# EAGLE board top_pcb (EAGLE 8.4.1)
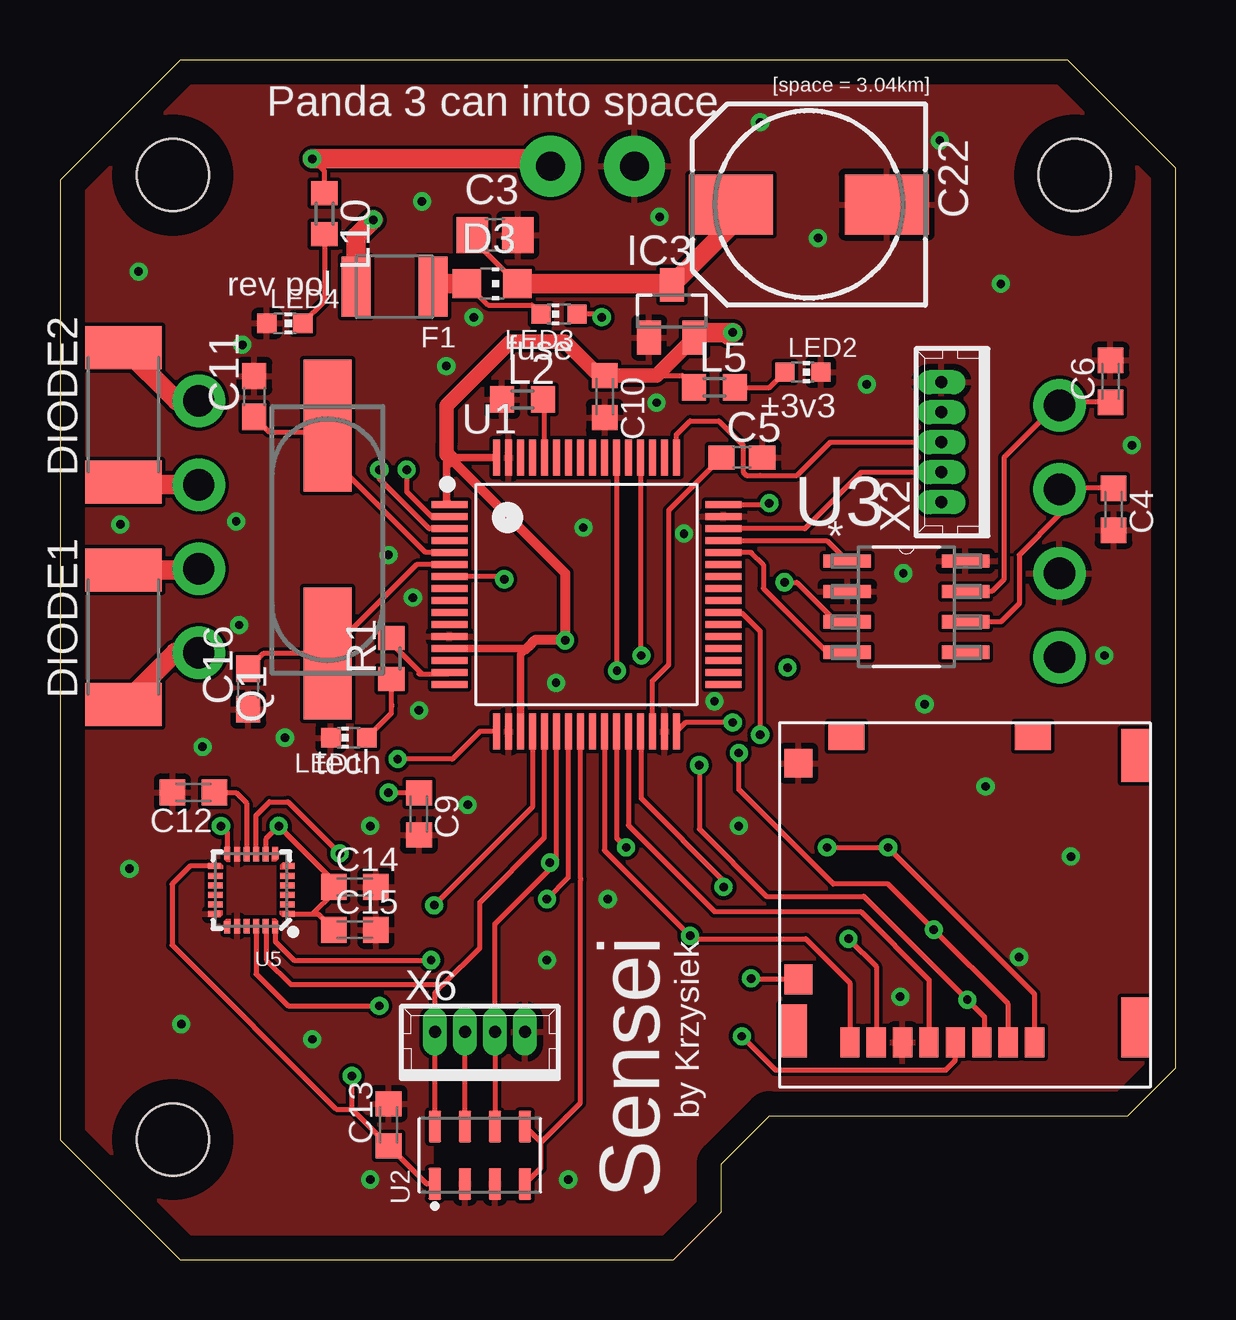
[diagram p0: board, top side]
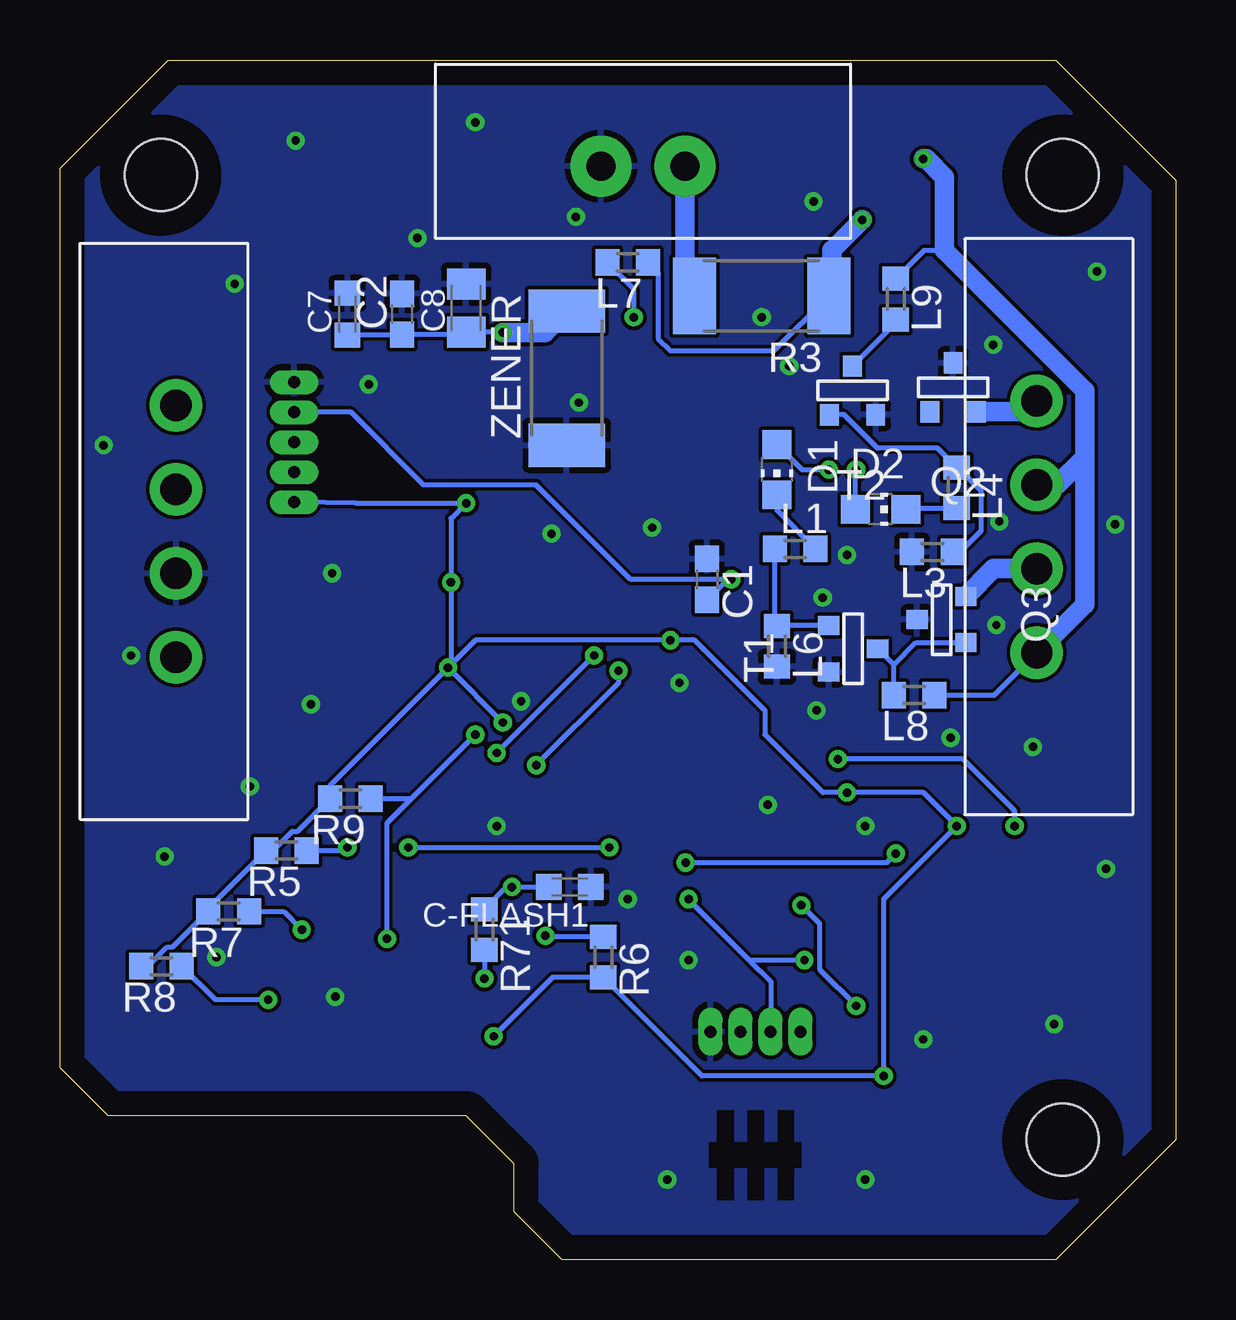
[diagram p1: board, bottom side, seen from below]

Size 46.5 x 50 mm. Coordinates in mm from the lower left corner, seen from the top.
Outline: 0,5 5,0 25.56,0 27.56,2 27.56,4 29.56,6 44.5,6 46.5,8 46.5,45.5 42,50 5,50 0,45 0,5
Copper layers (1*16): Top 0.035mm / dielectric 1.5mm / Bottom 0.035mm
Design rules "default": minimum track width 6mil, minimum drill 0.35mm, track to track 6mil, track to pad 6mil, pad to pad 6mil, via to via 6mil, smd to smd 6mil, copper to edge 40mil, drill to drill 6mil, minimum pad ring 10mil, minimum via ring 8mil, stop-mask expansion 4mil, vias tented up to drill 0mil, thermal gap 10mil
Holes 3 mm at 4.7,45.2 4.7,5 42.3,45.2

## Footprints (pad centres in the part's own frame; a part is rotated, then mirrored left to right if it is on the bottom)
C0603 = smd 1.1 x 1: 1 -0.85,0; 2 0.85,0
C0805 = smd 1.3 x 1.5: 1 -0.95,0; 2 0.95,0
C0603K = smd 1.05 x 1.08: 1 -0.875,0; 2 0.875,0
C0805K = smd 1.3 x 1.6: 1 -1,0; 2 1,0
140CLH-0810 = smd 3.5 x 2.5: + 3.25,0; - -3.25,0
CHIP-LED0805 = smd 1.2 x 1.2: A 0,-1.05; C 0,1.05
R2512 = smd 1.8 x 3.2: 1 -2.8,0; 2 2.8,0
F1210 = smd 1.2 x 2.5: 1 -1.6,0; 2 1.6,0
SOT23 = smd 1 x 1.4: 1 -0.95,-1.1; 2 0.95,-1.1; 3 0,1.1
R0603 = smd 1 x 1.1: 1 -0.85,0; 2 0.85,0
CHIP-LED0603 = smd 0.8 x 0.8: A 0,-0.75; C 0,0.75
CSM-7X-DU = smd 5.5 x 2: 1 -4.75,0; 2 4.75,0
SOT-23 = smd 0.787 x 0.889: 1 0.025,-1.016; 2 -0.94,1.016; 3 0.991,1.016
QFP50P1200X1200X160-64N = smd 1.5 x 0.3: 1 -5.7,3.75; 2 -5.7,3.25; 3 -5.7,2.75; 4 -5.7,2.25; 5 -5.7,1.75; 6 -5.7,1.25; 7 -5.7,0.75; 8 -5.7,0.25; 9 -5.7,-0.25; 10 -5.7,-0.75; 11 -5.7,-1.25; 12 -5.7,-1.75; 13 -5.7,-2.25; 14 -5.7,-2.75; 15 -5.7,-3.25; 16 -5.7,-3.75; 33 5.7,-3.75; 34 5.7,-3.25; 35 5.7,-2.75; 36 5.7,-2.25; 37 5.7,-1.75; 38 5.7,-1.25; 39 5.7,-0.75; 40 5.7,-0.25; 41 5.7,0.25; 42 5.7,0.75; 43 5.7,1.25; 44 5.7,1.75; 45 5.7,2.25; 46 5.7,2.75; 47 5.7,3.25; 48 5.7,3.75 | smd 0.3 x 1.5: 17 -3.75,-5.7; 18 -3.25,-5.7; 19 -2.75,-5.7; 20 -2.25,-5.7; 21 -1.75,-5.7; 22 -1.25,-5.7; 23 -0.75,-5.7; 24 -0.25,-5.7; 25 0.25,-5.7; 26 0.75,-5.7; 27 1.25,-5.7; 28 1.75,-5.7; 29 2.25,-5.7; 30 2.75,-5.7; 31 3.25,-5.7; 32 3.75,-5.7; 49 3.75,5.7; 50 3.25,5.7; 51 2.75,5.7; 52 2.25,5.7; 53 1.75,5.7; 54 1.25,5.7; 55 0.75,5.7; 56 0.25,5.7; 57 -0.25,5.7; 58 -0.75,5.7; 59 -1.25,5.7; 60 -1.75,5.7; 61 -2.25,5.7; 62 -2.75,5.7; 63 -3.25,5.7; 64 -3.75,5.7
SON125P500X300X100-8N = smd 1.31 x 0.52: 1 -1.195,1.875; 2 -1.195,0.625; 3 -1.195,-0.625; 4 -1.195,-1.875; 5 1.195,-1.875; 6 1.195,-0.625; 7 1.195,0.625; 8 1.195,1.875
SOIC127P600X175-8N = smd 1.981 x 0.559: 1 -2.464,1.905; 2 -2.464,0.635; 3 -2.464,-0.635; 4 -2.464,-1.905; 5 2.464,-1.905; 6 2.464,-0.635; 7 2.464,0.635; 8 2.464,1.905
MPU-9250 = smd 0.495 x 0.25: 1 -1.552,1; 6 -1.552,-1; 13 1.552,-1; 18 1.552,1 | smd 0.6 x 0.25: 2 -1.5,0.6; 3 -1.5,0.2; 4 -1.5,-0.2; 5 -1.5,-0.6; 14 1.5,-0.6; 15 1.5,-0.2; 16 1.5,0.2; 17 1.5,0.6 | smd 0.25 x 0.495: 7 -1,-1.552; 12 1,-1.552; 19 1,1.552; 24 -1,1.552 | smd 0.25 x 0.6: 8 -0.6,-1.5; 9 -0.2,-1.5; 10 0.2,-1.5; 11 0.6,-1.5; 20 0.6,1.5; 21 0.2,1.5; 22 -0.2,1.5; 23 -0.6,1.5
39505-1005 = drill 1.3 pad 2.184: P$1 -27,6; P$2 -23.5,6; P$3 -20,6; P$4 -16.5,6
TE_3.5_TERMINAL_VERT = drill 1.2 pad 2.54: P$1 1.75,-3; P$2 -1.75,-3
MOLEX_MICRO_SD_503182-1853 = smd 1.16 x 1.25: DETECT 14.66,10.7 | smd 1.16 x 1.2: DETECT_GND 14.66,1.7 | smd 1.15 x 2.5: P$9 0.635,12.7 | smd 1.15 x 2.2: P$10 0.625,1.37 | smd 1.5 x 1.15: P$11 4.88,0.575; P$12 12.66,0.575 | smd 1.12 x 2.2: P$15 14.865,12.85 | smd 0.8 x 1.24: PIN1 4.82,13.33; PIN2 5.92,13.33; PIN3 7.02,13.33; PIN4 8.12,13.33; PIN5 9.22,13.33; PIN6 10.32,13.33; PIN7 11.42,13.33; PIN8 12.52,13.33
53047-05 = drill 0.5 pad 0.698 long: 1 2.5,0.45; 2 1.25,0.45; 3 0,0.45; 4 -1.25,0.45; 5 -2.5,0.45
53047-04 = drill 0.5 pad 0.698 long: 1 1.875,0.45; 2 0.625,0.45; 3 -0.625,0.45; 4 -1.875,0.45

## Placement (x,y rotation side)
C1  0.1u  [C0603]  19.53,28.35 270 bottom
C2  2u2  [C0603]  32.23,39.4 90 bottom
C3  4u7  [C0805]  18.14,42.7 0 top
C4  100p  [C0603K]  43.92,31.27 270 top
C5  4.7u  [C0603]  28.42,33.43 0 top
C6  100p  [C0603K]  43.79,36.61 90 top
C7  100n  [C0603K]  34.52,39.4 90 bottom
C8  10u  [C0805K]  29.57,39.66 90 bottom
C9  100n  [C0603K]  14.96,18.57 270 top
C10  100n  [C0603K]  22.71,35.97 270 top
C11  30pF  [C0603]  8.1,35.97 90 top
C12  H100n  [C0603K]  5.56,19.46 180 top
C13  100p  [C0603K]  13.69,5.62 90 top
C14  H10n  [C0603K]  12.29,15.53 0 top
C15  H100n  [C0603K]  12.29,13.75 0 top
C16  30pF  [C0603]  7.85,23.78 90 top
C22  10u  [140CLH-0810]  31.22,43.97 180 top
C-FLASH1  100n  [C0603K]  25.25,15.53 180 bottom
D1  [CHIP-LED0805]  16.61,32.92 180 bottom
D2  [CHIP-LED0805]  12.29,31.27 270 bottom
D3  [CHIP-LED0805]  18.01,40.67 270 top
DIODE1  [R2512]  2.64,25.94 90 top
DIODE2  [R2512]  2.64,35.21 90 top
F1  SMD-PPTC-750MA-6V(1210)  [F1210]  13.95,40.55 180 top
IC3  MCP1703CB  [SOT23]  25.5,39.53 0 top
L1  5k  [R0603]  15.85,29.62 0 bottom
L2  470  [R0603]  19.28,35.85 0 top
L3  100k  [R0603]  10.14,29.5 180 bottom
L4  5k  [R0603]  9.12,32.16 270 bottom
L5  2.3k  [R0603]  27.28,36.35 0 top
L6  100k  [R0603]  16.61,25.56 270 bottom
L7  2.3k  [R0603]  22.84,41.56 180 bottom
L8  100k  [R0603]  10.9,23.53 180 bottom
L9  100k  [R0603]  11.66,40.04 270 bottom
L10  1k  [R0603]  11.03,43.59 270 top
LED1  [CHIP-LED0603]  12.04,21.75 90 top
LED2  [CHIP-LED0603]  30.96,36.99 270 top
LED3  [CHIP-LED0603]  20.8,39.4 90 top
LED4  [CHIP-LED0603]  9.37,39.02 270 top
Q1  8MHz  [CSM-7X-DU]  11.15,30 90 top
Q2  [SOT-23]  9.25,36.35 180 bottom
Q3  [SOT-23]  9.76,26.7 270 bottom
R1  470R  [R0603]  13.82,25.05 90 top
R3  [R2512]  17.25,40.16 180 bottom
R5  47k  [R0603]  37.06,17.05 180 bottom
R6  47k  [R0603]  23.85,12.61 270 bottom
R7  47k  [R0603]  39.47,14.51 180 bottom
R8  47k  [R0603]  42.27,12.22 180 bottom
R9  47k  [R0603]  34.39,19.21 180 bottom
R71  2k  [R0603]  28.8,13.75 270 bottom
T1  [SOT-23]  13.44,25.43 90 bottom
T2  [SOT-23]  13.44,36.23 180 bottom
U1  STM32F446RCT6  [QFP50P1200X1200X160-64N]  21.95,27.72 0 top
U2  MS561101BA03-00  [SON125P500X300X100-8N]  17.5,4.35 90 top
U3  SN65HVD230DR  [SOIC127P600X175-8N]  35.28,27.21 0 top
U5  MPU-9250  [MPU-9250]  7.98,15.4 180 top
U$1  39505-1005  [39505-1005]  11.79,8.79 270 bottom
U$2  TERMINAL_TE_3.50_VERT  [TE_3.5_TERMINAL_VERT]  22.2,42.58 180 bottom
U$4  MOLEX_MICRO_SD_503182-1853  [MOLEX_MICRO_SD_503182-1853]  45.44,22.38 180 top
U$10  39505-1005  [39505-1005]  35.66,52.1 90 bottom
X2  53047-05  [53047-05]  37.19,34.07 90 top
X6  53047-04  [53047-04]  17.5,9.05 0 top
ZENER  [R2512]  25.38,36.73 90 bottom

## Library data of the parts
C1 = rcl; SPICEPREFIX: C
C2-C10 C12-C15 C22 C-FLASH1 L1-L10 R1 R5-R9 R71 = rcl
C11 C16 = resistor
D1-D3 LED1-LED4 = led
DIODE1 DIODE2 R3 ZENER = eagle-ltspice; SPICEMODEL: NONE; SPICEPREFIX: R
F1 = SMD1210; AVAILABILITY: Unavailable; DESCRIPTION: SMD PPTC 750mA-6V; MF: Darong; MP: SMD1210R075SF; PACKAGE: None; PRICE: None
IC3 = linear
Q1 = crystal; OC_FARNELL: unknown; OC_NEWARK: unknown
Q2 Q3 = zetex; OC_FARNELL: unknown; OC_NEWARK: unknown
T1 T2 = zetex; MPN: DSS20201L-7; OC_FARNELL: 1710688; OC_NEWARK: 25R4555
U1 = STM32F446RCT6; AVAILABILITY: Good; DESCRIPTION: 32 Bit Microcontroller, High Performance, ARM Cortex-M4, 180 MHz, 256 KB, 128 KB, 64, LQFP; MF: STMicroelectronics; MP: STM32F446RCT6; PACKAGE: LQFP-64 STMicroelectronics; PRICE: 5.57 USD
U2 = MS561101BA03-00; AVAILABILITY: Bad; DESCRIPTION: BAROMETRIC PRESSURE SENSOR; EU_ROHS_COMPLIANCE: Compliant; LINK: http://www.te.com/usa-en/product-MS561101BA03-00.html; MF: TE Connectivity; MP: MS561101BA03-00; PACKAGE: SMD-8 TE Connectivity; PRICE: 8.19 USD
U3 = SN65HVD230DR; AVAILABILITY: Good; DESCRIPTION: 3.3V CAN Transceiver with Standby Mode 8-SOIC -40 to 85; MF: Texas Instruments; MP: SN65HVD230DR; PACKAGE: SOIC-8 Texas Instruments; PRICE: 1.59 USD
U5 = MPU-9250; AVAILABILITY: Good; DESCRIPTION: SMD Gyroscope/Accelerometer/Magnetometer Sensor; 9-AXIS; MF: InvenSense; MP: MPU-9250; PACKAGE: QFN-24 InvenSense; PRICE: 6.45 USD
U$1 U$10 = 39505-1005
U$2 = Terminal_TE_3.50
U$4 = SD_Reader
X2 = con-molex; MF: MOLEX; MPN: 53047-0510; OC_FARNELL: 9732861; OC_NEWARK: 38C9901
X6 = con-molex; MF: WALDOM/MOLEX; MPN: 53047-0410; OC_FARNELL: 9733060; OC_NEWARK: 38C9900

## Nets
+3V3: C2.1 C7.1 C8.1 C9.1 C10.1 C13.1 C14.1 C15.1 IC3.2 L5.1 R5.2 R6.2 R7.2 R8.2 R9.2 U1.1 U1.13 U1.19 U1.32 U1.48 U1.64 U2.1 U3.3 U5.1 U5.8 U5.13 U$4.PIN4 X2.5 ZENER.2
BATTERY: DIODE1.1 DIODE2.1 L8.1 L9.1 L10.1 R3.2 U$1.P$2 U$1.P$4 U$2.P$2
CAN1_RX: U1.44 U3.4
CAN1_TX: U1.45 U3.1
CANH: C6.1 U3.7 U$10.P$4
CANL: C4.1 U3.6 U$10.P$3
GND: C1.1 C2.2 C3.2 C4.2 C5.2 C6.2 C7.2 C8.2 C9.2 C10.2 C11.2 C12.2 C13.2 C14.2 C15.2 C16.1 C22.- C-FLASH1.1 IC3.1 L2.1 L3.2 L6.2 LED1.C LED2.C LED4.A Q2.1 Q3.1 T1.2 T2.2 U1.12 U1.18 U1.31 U1.47 U1.63 U2.2 U2.3 U3.2 U3.8 U5.11 U5.18 U5.20 U$2.P$1 U$4.DETECT_GND U$4.PIN6 U$10.P$2 X2.1 X6.1 ZENER.1
IGNITE1: D1.A U1.2
IGNITE2: D2.A U1.3
IN: C11.1 Q1.2 U1.5
LED_ON: R1.2 U1.15
MPU_CS: U1.20 U5.22
MPU_INT: U1.17 U5.12
MS_CS: U1.24 U2.4 U2.5
N$1: C5.1 U1.30
N$2: L7.2 LED3.A
N$3: L3.1 L4.1 T2.3
N$4: L5.2 LED2.A
N$5: LED1.A R1.1
N$6: D1.C L1.2
N$7: L1.1 L6.1 T1.3
N$8: F1.2 L7.1 R3.1
N$9: L10.2 LED4.C
N$10: L2.2 U1.60
N$11: D3.A F1.1 LED3.C
N$12: C12.1 U5.10
N$13: L8.2 Q3.3 T1.1
N$14: D2.C L4.2
N$15: L9.2 T2.1
N$79: R71.2 U$4.DETECT
NRST: C1.2 U1.7 X2.2
OUT: C16.2 Q1.1 U1.6
OUT1: DIODE1.2 Q3.2 U$1.P$3
OUT2: DIODE2.2 Q2.2 U$1.P$1
SAFE_BAT: C3.1 C22.+ D3.C IC3.3
SD_DETECT: C-FLASH1.2 R71.1 U1.29
SDIO_CLK: U1.28 U$4.PIN5
SDIO_CMD: R8.1 U1.54 U$4.PIN3
SDIO_D0: R9.1 U1.39 U$4.PIN7
SDIO_D1: R6.1 U1.26 U$4.PIN8
SDIO_D2: R5.1 U1.27 U$4.PIN1
SDIO_D3: R7.1 U1.52 U$4.PIN2
SPI1_MISO: U1.22 U2.6 U5.9 X6.2
SPI1_MOSI: U1.23 U2.7 U5.24 X6.3
SPI1_SCK: U1.21 U2.8 U5.23 X6.4
SWCLK: U1.49 X2.3
SWDIO: U1.46 X2.4

## Tracks (layer width: path | path; a pad name or v marks a point on that pad's centre or on a via)
+3V3  (via drill 0.35)
  Top 0.203: U1.48 29.51,31.47 v29.57,31.53 | 15.63,3.08 U2.1 15.28,3.16 C13.1 12.17,6.27 | U5.8 8.6,16.92 8.6,17.54 v9.12,18.07 11.42,15.77 C14.1 11.42,15.29 10.53,14.4 10.64,14.4 | 10.64,14.4 10.77,14.4 C15.1 | 12.17,6.27 v12.17,7.65 | 12.17,6.27 11.52,6.27 4.67,13.11 4.67,15.65 5.42,16.4 U5.13 | 19.15,22.06 U1.19 | v13.69,19.46 14.95,19.46 C9.1 | C10.1 22.57,36.99 22.33,36.99 | v30.2,28.23 30.71,28.23 32.36,26.57 U3.3 | 24.87,36.85 25.94,36.85 L5.1 | v28.04,22.38 26.06,22.38 U1.32 | v28.42,9.3 29.82,7.91 36.93,7.91 37.32,8.29 U$4.PIN4 | U5.1 10.64,14.4
  Top 0.305: U1.64 16.49,33.42 | 16.47,33.42 16.25,33.42 16.11,33.56 16.11,33.05 | 16.11,33.05 16.11,31.61 U1.1 | 16.11,33.05 16.47,33.42 | 16.47,33.42 16.49,33.42 | 16.49,33.42 16.11,33.8 16.11,33.94 | U1.13 19.37,25.47 19.41,25.43 | U1.19 19.2,25.22 19.53,25.56
  Top 0.406: 16.11,33.56 21.06,28.61 v21.06,25.81 19.79,25.81 19.53,25.56 19.41,25.43
  Top 0.61: 16.11,33.56 16.11,33.94 16.11,35.59 18.77,38.26 21.06,38.26 22.33,36.99 | C10.1 24.87,36.85 IC3.2 | 27.83,38.43 v28.04,38.64
  Top 0.813: v28.04,38.64 26.66,38.64 IC3.2
  Bottom 0.203: X2.5 34.16,31.53 v29.57,31.53 30.2,30.89 v30.2,28.23 | v30.2,28.23 30.2,28.1 | 30.07,24.67 v30.33,24.67 | 30.2,24.8 29.19,25.81 v21.06,25.81 20.04,25.81 17.12,22.89 17.12,21.88 14.71,19.46 v13.69,19.46 10.52,19.46 v9.12,18.07 12.17,15.02 v12.17,7.65 19.75,7.65 R6.2 25.97,11.76 v28.42,9.3 28.55,9.18 | C7.1 32.26,38.53 C2.1 29.67,38.55 C8.1 28.06,38.66 v28.04,38.64 | R8.2 42.83,12.22 42.02,13.03 41.8,13.03 R7.2 40.32,14.64 R5.2 37.62,17.05 36.81,17.85 36.6,17.85 R9.2 35.24,19.76 v30.33,24.67 | v30.33,24.67 v28.04,22.38 | v30.2,28.23 30.2,24.8 | v30.33,24.67 30.2,24.8
  Bottom 0.813: v28.04,38.64 26.27,38.64 ZENER.2
BATTERY  (via drill 0.35)
  Top 0.203: L10.1 11.03,45.37 v10.52,45.88
  Top 0.813: U$2.P$2 20.15,45.88 v10.52,45.88 | U$1.P$2 2.76,32.3 DIODE2.1 | U$1.P$4 4.8,25.3 DIODE1.1
  Bottom 0.203: L8.1 7.55,23.53 U$1.P$4 | L9.1 10.48,42.07 9.63,42.07
  Bottom 0.813: U$1.P$2 4.92,32.3 3.79,33.43 | U$1.P$4 3.79,27.3 3.79,33.43 | 3.79,33.43 3.79,36.23 9.63,42.07 9.63,45.12 10.39,45.88 v10.52,45.88 | U$2.P$2 20.45,40.57 R3.2
CAN1_RX
  Top 0.203: 28.83,29.47 28.8,29.47 | 28.8,29.47 U1.44 | 28.8,29.47 29.31,28.96 29.31,27.97 31.98,25.3 U3.4
CAN1_TX
  Top 0.203: U1.45 31.96,29.97 U3.1
CANH
  Top 0.203: C6.1 41.79,35.73 U$10.P$4 41.52,35.6 39.35,33.43 39.35,28.35 38.84,27.84 U3.7
CANL
  Top 0.203: U3.6 37.77,26.57 39.22,26.57 39.98,27.34 39.98,29.37 41.66,31.05 U$10.P$3 41.71,32.15 C4.1
GND  (via drill 0.35)
  other vias: 42.14,16.8 9.37,21.75 16.99,18.95 14.96,22.89 27.28,23.27 7.6,38.13 17.25,39.27 7.34,30.77 20.3,12.48 22.84,15.02 10.52,9.18 5.06,9.81 35.03,10.95 39.98,12.61 33.63,36.48 26.01,30.26 36.04,23.15 7.47,26.45 16.11,37.24 3.28,41.18 29.19,47.4 39.22,40.67 24.87,35.72 13.69,29.37 21.82,30.51 12.93,18.07 5.95,21.37 2.9,16.29 15.09,44.1 25,43.47 31.6,42.58 36.68,46.64 28.3,18.07 44.68,33.94 43.54,25.18 38.58,19.72 35.16,28.61 20.68,24.04 12.93,3.33 21.18,3.33 2.52,30.64 14.71,27.59
  pour Bottom: -1.42,50.7 -1.42,5.24 5.06,-1.24 38.71,-1.24 47.98,8.03 47.98,45.12 42.27,50.83 -1.17,50.83 -1.29,50.7
  pour Top: -1.8,50.83 -1.8,4.86 5.18,-2.13 38.33,-2.13 48.74,8.29 48.74,45.12 47.85,46.01 42.52,51.34 40.62,51.34 -1.42,51.34 -1.8,50.96
IGNITE1  (via drill 0.35)
  Top 0.203: v14.45,32.92 14.45,32 15.49,30.97 U1.2
  Bottom 0.203: D1.A 15.56,32.92 v14.45,32.92
IGNITE2  (via drill 0.35)
  Top 0.203: U1.3 15.39,30.47 13.31,32.54 v13.31,32.92
  Bottom 0.203: D2.A 13.35,32.89 v13.31,32.92
IN
  Top 0.203: C11.1 8.73,34.5 10.9,34.5 Q1.2 11.15,33.56 15.22,29.5 16.22,29.5 U1.5
LED_ON
  Top 0.203: 14.96,24.42 15.09,24.42 | 15.09,24.42 16.2,24.42 U1.15 | 15.09,24.42 13.82,25.69 R1.2
MPU_CS  (via drill 0.35)
  Top 0.203: U1.20 19.7,18.86 v15.6,14.76 | U5.22 8.18,11.9 9.5,10.57 v13.31,10.57
  Bottom 0.203: v15.6,14.76 14.84,14 14.84,12.1 v13.31,10.57
MPU_INT  (via drill 0.35)
  Top 0.203: U5.12 6.98,17.8 v6.71,18.07 | v14.07,20.86 16.36,20.86 17.52,22.02 U1.17
  Bottom 0.203: v6.71,18.07 6.71,18.7 8.87,20.86 v14.07,20.86
MS_CS
  Top 0.203: U2.4 20.04,3.82 20.04,4.88 | U2.5 20.04,4.88 | 20.04,4.88 21.69,6.53 21.69,15.78 21.69,15.91 U1.24
N$1
  Top 0.203: U1.30 24.7,24.12 25.38,24.8 25.38,31.23 C5.1
N$2  (via drill 0.35)
  Top 0.203: v22.58,39.27 22.45,39.4 LED3.A
  Bottom 0.203: v22.58,39.27 22.58,40.46 L7.2
N$3
  Bottom 0.203: L4.1 9.12,32.72 | L4.1 9.92,33.81 12.42,33.81 13.82,35.21 T2.3 | 8.74,29.75 8.87,29.62 | 8.74,29.75 8.1,30.38 8.1,32.04 9.08,33.01 L4.1 | L3.1 9.03,29.75 8.74,29.75
N$4
  Top 0.203: L5.2 29.58,36.35 LED2.A
N$5
  Top 0.203: 13.81,24.19 R1.1 13.82,23.15 | 13.82,23.15 13.82,23.03 | LED1.A 13.82,22.78 13.82,23.15
N$6
  Bottom 0.203: L1.2 16.61,31.23 D1.C
N$7
  Bottom 0.203: T1.3 16.6,26.42 L6.1 16.7,26.5 L1.1
N$8  (via drill 0.35)
  Top 0.813: v13.06,43.34 12.35,42.63 F1.2
  Bottom 0.203: R3.1 16.73,37.88 21.06,37.88 21.57,38.39 21.57,41.14 L7.1
  Bottom 0.813: v13.06,43.34 14.32,42.08 14.32,40.29 R3.1
N$9
  Top 0.203: L10.2 11.03,39.92 LED4.C
N$10
  Top 0.203: U1.60 20.2,35.78 L2.2
N$11
  Top 0.203: LED3.C 19.67,39.79 17.85,39.79 D3.A
  Top 0.813: 15.67,40.67 F1.1 15.67,40.67 | D3.A 15.67,40.67
N$12
  Top 0.203: C12.1 7.34,19.46 7.78,19.03 U5.10
N$13
  Bottom 0.203: L8.2 11.75,24.78 | 11.75,24.78 T1.1 | 11.75,24.78 10.82,25.71 Q3.3
N$14
  Bottom 0.203: D2.C 11.21,31.31 L4.2
N$15
  Bottom 0.203: T2.1 11.66,39.05 L9.2
N$79  (via drill 0.35)
  Top 0.203: U$4.DETECT 28.84,11.68 v28.8,11.72
  Bottom 0.203: R71.2 v28.8,11.72
NRST  (via drill 0.35)
  Top 0.203: U1.7 18.4,28.47 v18.52,28.35
  Bottom 0.203: X2.2 34.37,35.32 31.34,32.29 26.65,32.29 22.71,28.35 v18.52,28.35 18.68,28.35 C1.2
OUT
  Top 0.203: U1.6 14.87,28.97 Q1.1 8.47,25.25 C16.2
OUT1
  Top 0.813: U$1.P$3 5.73,28.74 DIODE1.2
  Bottom 0.813: Q3.2 7.59,28.8 U$1.P$3
OUT2
  Top 0.813: U$1.P$1 4.86,35.8 DIODE2.2
  Bottom 0.813: Q2.2 6.24,35.34 U$1.P$1
SAFE_BAT
  Top 0.203: C3.1 17.19,42.55 D3.C
  Top 0.813: IC3.3 27.97,43.09 C22.+ | 25.46,40.67 IC3.3 | D3.C 25.46,40.67 | 25.46,40.67 IC3.3
SD_DETECT  (via drill 0.35)
  Top 0.203: U1.29 24.23,21.98 24.23,19.21 27.66,15.78 v27.66,15.53
  Bottom 0.203: C-FLASH1.2 v27.66,15.53 27.88,15.53 R71.1
SDIO_CLK
  Top 0.203: U1.28 23.7,18.09 27.28,14.51 33.38,14.51 36.22,11.66 U$4.PIN5
SDIO_CMD  (via drill 0.35)
  Top 0.203: v23.22,24.54 23.22,33.4 U1.54 | v26.65,20.61 26.65,17.94 29.44,15.14 33.5,15.14 v37.82,10.83 38.55,10.1 38.55,9.18 U$4.PIN3
  Bottom 0.203: v26.65,20.61 23.22,24.04 v23.22,24.54 | v37.82,10.83 40.02,10.83 R8.1
SDIO_D0  (via drill 0.35)
  Top 0.203: v29.19,21.88 29.19,26.19 28.41,26.97 U1.39 | v32.87,13.37 34.02,12.21 U$4.PIN7
  Bottom 0.203: v32.87,13.37 32.87,18.19 31.85,19.21 | 31.85,19.21 v29.19,21.88 | R9.1 31.85,19.21
SDIO_D1  (via drill 0.35)
  Top 0.203: U1.26 22.7,17.06 v26.27,13.49 26.39,13.37 31.09,13.37 32.92,11.54 U$4.PIN8
  Bottom 0.203: R6.1 26.23,13.46 v26.27,13.49
SDIO_D2  (via drill 0.35)
  Top 0.203: U1.27 23.22,22 23.22,17.56 v23.6,17.18 | U$4.PIN1 40.62,11.07 39.35,12.34 39.35,12.35 v34.52,17.18 v31.98,17.18
  Bottom 0.203: v31.98,17.18 v23.6,17.18 | R5.1 34.65,17.05 v34.52,17.18
SDIO_D3  (via drill 0.35)
  Top 0.203: U1.52 24.2,25.21 v24.23,25.18 | 39.6,9.1 U$4.PIN2 39.52,10.65 v36.42,13.75 34.52,15.65 32.23,15.65 28.3,19.59 v28.3,21.11
  Bottom 0.203: v24.23,25.18 v28.3,21.11 | R7.1 37.19,14.51 v36.42,13.75
SPI1_MISO  (via drill 0.35)
  Top 0.203: 20.7,16.67 U1.22 | 20.7,16.67 20.7,16.56 18.13,13.99 X6.2 U2.6 | v20.42,16.54 20.57,16.54 20.7,16.67 | U5.9 8.18,18.52 8.74,19.08 9.5,19.08 v11.66,16.92
  Bottom 0.203: v20.42,16.54 12.04,16.54 v11.66,16.92
SPI1_MOSI  (via drill 0.35)
  Top 0.203: U1.23 21.2,15.92 v20.3,15.02 | U5.24 8.98,13.26 9.76,12.48 v15.47,12.48 | U2.7 X6.3
  Bottom 0.203: 17.76,12.48 v20.3,15.02 19.03,13.75 | 17.76,12.48 16.87,11.59 16.87,9.13 X6.3 | v15.47,12.48 17.76,12.48
SPI1_SCK
  Top 0.203: U1.21 20.2,17.59 17.5,14.89 17.5,12.99 15.98,11.46 | U5.23 8.6,13.88 8.6,12.49 9.63,11.46 15.98,11.46 | U2.8 X6.4 15.63,11.11 15.98,11.46
SWCLK
  Top 0.203: U1.49 25.7,34.39 26.27,34.96 27.46,34.96 28.47,33.95 28.47,32.83 28.62,32.68 29.18,32.68 | X2.3 32.11,34.07 30.72,32.68 29.18,32.68 | 29.18,32.68 29.19,32.67
SWDIO
  Top 0.152: 33.38,32.8 33.4,32.82
  Top 0.203: U1.46 31.05,30.47 33.38,32.8 33.4,32.82 X2.4

## Text on the board
tPlace: [space = 3.04km] | Panda 3 can into space | rev pol | fuse | +3v3 | tech | by Krzysiek | Sensei